# Altium PCB AVR精简学习板.PcbDoc (part 2 of 10)
Units mm, origin at the board's own origin, x right, y up, seen from the top; angles counter-clockwise.
Board outline 152.4 x 101.6 mm, 2 copper layers (Top Layer, Bottom Layer); 44 components, 51 nets, 211 pads, 6 vias.
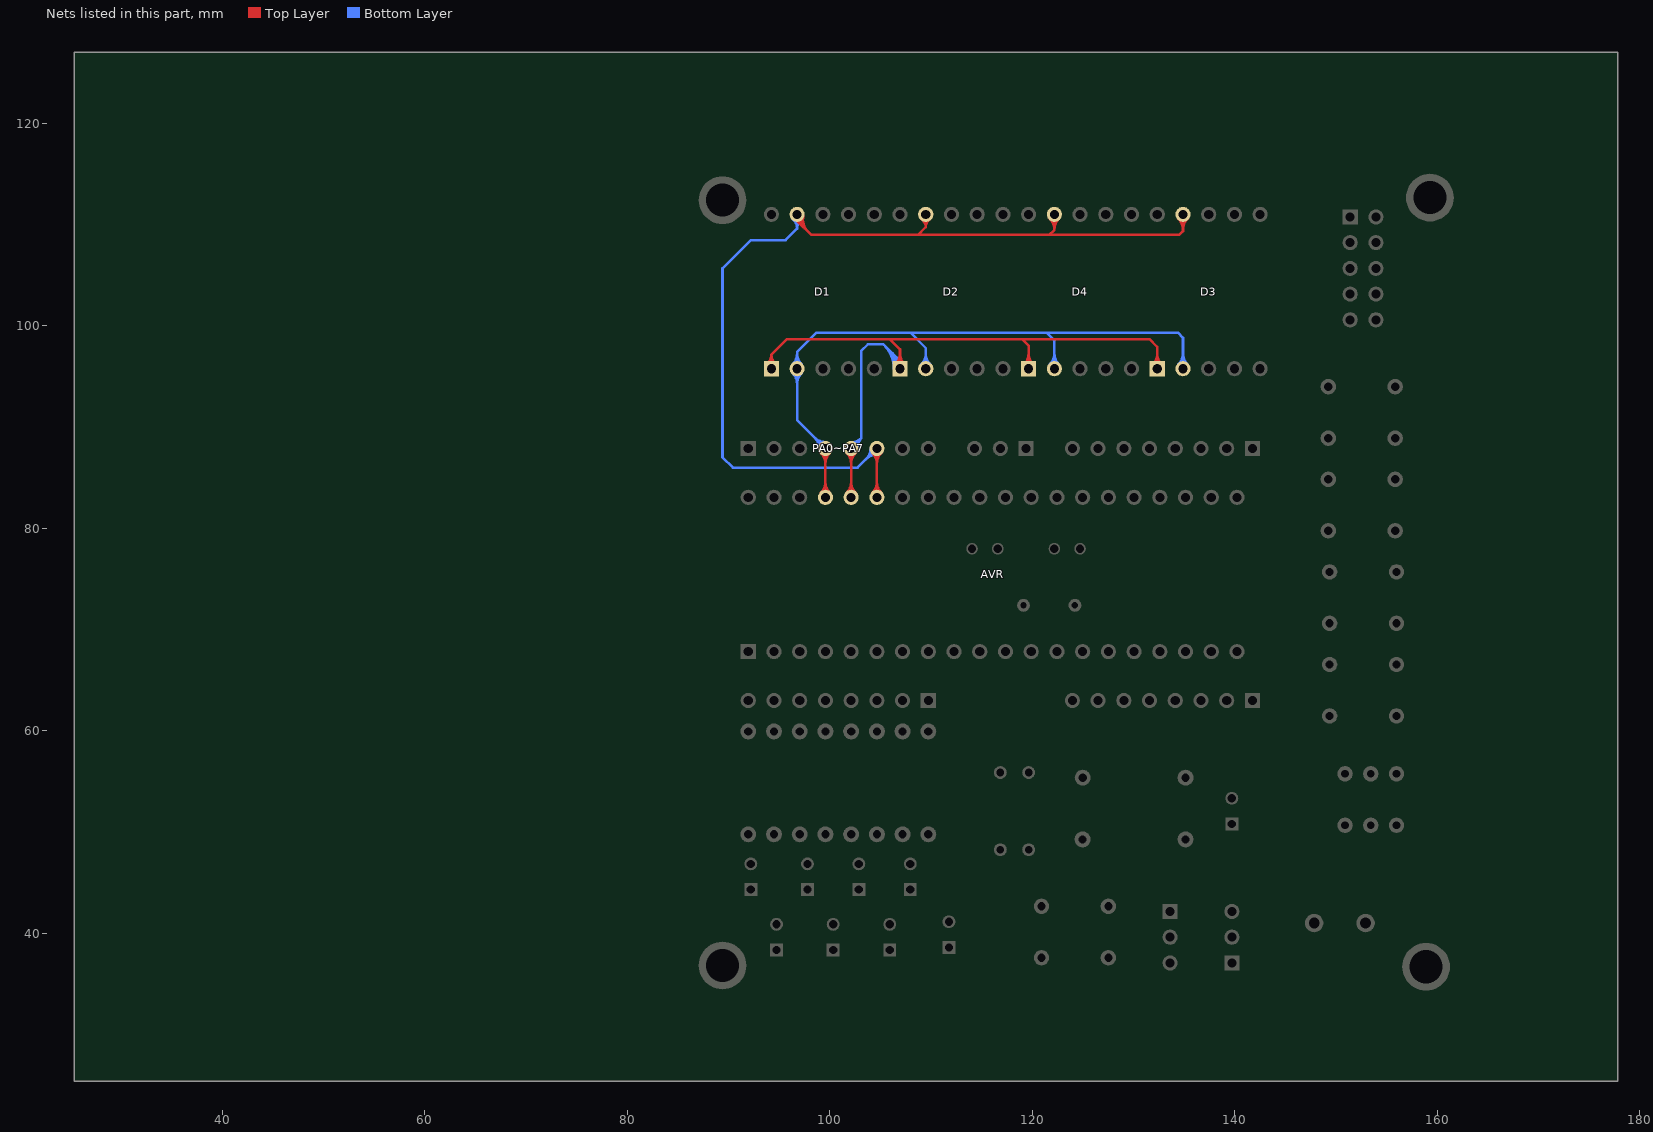
[diagram p2: the nets of this part, all layers, seen from the top]

## Via types
v1: diameter 1.27, hole 0.711, Top Layer to Bottom Layer, 6 vias

## Nets (pads, with @x,y where several pads share a name; then routed paths per layer and width w, separated by ;. In a path a pad name is that pad's centre, name@x,y a point inside that pad or via, vN(x,y) a via of type N, cw(c..) or ccw(c..) an arc to the next point about the centre after c; other vN are vias at no path point) (continued)
D3: AVR.37 D1.2 D2.2 D3.2 D4.2 PA0~PA7.4 | length 276.4
  Top Layer w0.254: AVR.37@99.568,83.058 PA0~PA7.4@99.568,87.884 ; AVR.37@99.127,83.499 ccw(c98.064,84.562) 99.568,84.562 ; AVR.37@99.127,83.499 ccw(c98.064,84.562) 99.568,84.562 ; AVR.37@99.127,83.499 ccw(c98.064,84.562) 99.568,84.562 ; AVR.37@99.127,83.499 ccw(c98.064,84.562) 99.568,84.562 ; AVR.37@99.127,83.499 ccw(c98.064,84.562) 99.568,84.562 ; AVR.37@99.127,83.499 ccw(c98.064,84.562) 99.568,84.562 ; AVR.37@99.127,83.499 ccw(c98.064,84.562) 99.568,84.562 ; PA0~PA7.4@99.127,87.443 cw(c98.064,86.38) 99.568,86.38 ; PA0~PA7.4@99.127,87.443 cw(c98.064,86.38) 99.568,86.38 ; PA0~PA7.4@99.127,87.443 cw(c98.064,86.38) 99.568,86.38 ; PA0~PA7.4@99.127,87.443 cw(c98.064,86.38) 99.568,86.38 ; PA0~PA7.4@99.127,87.443 cw(c98.064,86.38) 99.568,86.38 ; PA0~PA7.4@99.127,87.443 cw(c98.064,86.38) 99.568,86.38 ; PA0~PA7.4@99.127,87.443 cw(c98.064,86.38) 99.568,86.38 ; AVR.37@99.307,83.319 ccw(c98.677,83.949) 99.568,83.949 ; AVR.37@99.307,83.319 ccw(c98.677,83.949) 99.568,83.949 ; AVR.37@99.307,83.319 ccw(c98.677,83.949) 99.568,83.949 ; AVR.37@99.307,83.319 ccw(c98.677,83.949) 99.568,83.949 ; AVR.37@99.307,83.319 ccw(c98.677,83.949) 99.568,83.949 ; AVR.37@99.307,83.319 ccw(c98.677,83.949) 99.568,83.949 ; AVR.37@99.307,83.319 ccw(c98.677,83.949) 99.568,83.949 ; PA0~PA7.4@99.307,87.623 cw(c98.677,86.993) 99.568,86.993 ; PA0~PA7.4@99.307,87.623 cw(c98.677,86.993) 99.568,86.993 ; PA0~PA7.4@99.307,87.623 cw(c98.677,86.993) 99.568,86.993 ; PA0~PA7.4@99.307,87.623 cw(c98.677,86.993) 99.568,86.993 ; PA0~PA7.4@99.307,87.623 cw(c98.677,86.993) 99.568,86.993 ; PA0~PA7.4@99.307,87.623 cw(c98.677,86.993) 99.568,86.993 ; PA0~PA7.4@99.307,87.623 cw(c98.677,86.993) 99.568,86.993 ; 99.568,83.949 ccw(c100.459,83.949) AVR.37@99.829,83.319 ; 99.568,83.949 ccw(c100.459,83.949) AVR.37@99.829,83.319 ; 99.568,83.949 ccw(c100.459,83.949) AVR.37@99.829,83.319 ; 99.568,83.949 ccw(c100.459,83.949) AVR.37@99.829,83.319 ; 99.568,83.949 ccw(c100.459,83.949) AVR.37@99.829,83.319 ; 99.568,83.949 ccw(c100.459,83.949) AVR.37@99.829,83.319 ; 99.568,83.949 ccw(c100.459,83.949) AVR.37@99.829,83.319 ; 99.568,84.562 ccw(c101.072,84.562) AVR.37@100.009,83.499 ; 99.568,84.562 ccw(c101.072,84.562) AVR.37@100.009,83.499 ; 99.568,84.562 ccw(c101.072,84.562) AVR.37@100.009,83.499 ; 99.568,84.562 ccw(c101.072,84.562) AVR.37@100.009,83.499 ; 99.568,84.562 ccw(c101.072,84.562) AVR.37@100.009,83.499 ; 99.568,84.562 ccw(c101.072,84.562) AVR.37@100.009,83.499 ; 99.568,84.562 ccw(c101.072,84.562) AVR.37@100.009,83.499 ; 99.568,86.38 cw(c101.072,86.38) PA0~PA7.4@100.009,87.443 ; 99.568,86.38 cw(c101.072,86.38) PA0~PA7.4@100.009,87.443 ; 99.568,86.38 cw(c101.072,86.38) PA0~PA7.4@100.009,87.443 ; 99.568,86.38 cw(c101.072,86.38) PA0~PA7.4@100.009,87.443 ; 99.568,86.38 cw(c101.072,86.38) PA0~PA7.4@100.009,87.443 ; 99.568,86.38 cw(c101.072,86.38) PA0~PA7.4@100.009,87.443 ; 99.568,86.38 cw(c101.072,86.38) PA0~PA7.4@100.009,87.443 ; 99.568,86.993 cw(c100.459,86.993) PA0~PA7.4@99.829,87.623 ; 99.568,86.993 cw(c100.459,86.993) PA0~PA7.4@99.829,87.623 ; 99.568,86.993 cw(c100.459,86.993) PA0~PA7.4@99.829,87.623 ; 99.568,86.993 cw(c100.459,86.993) PA0~PA7.4@99.829,87.623 ; 99.568,86.993 cw(c100.459,86.993) PA0~PA7.4@99.829,87.623 ; 99.568,86.993 cw(c100.459,86.993) PA0~PA7.4@99.829,87.623 ; 99.568,86.993 cw(c100.459,86.993) PA0~PA7.4@99.829,87.623
  Bottom Layer w0.254: PA0~PA7.4@99.568,87.884 96.774,90.678 96.774,97.409 98.679,99.314 134.366,99.314 134.874,98.806 D3.2@134.874,95.758 ; 107.95,99.314 109.474,97.79 D2.2@109.474,95.758 ; 121.412,99.314 122.174,98.552 D4.2@122.174,95.758 ; D1.2@96.333,95.317 cw(c95.27,94.254) 96.774,94.254 ; D1.2@96.333,95.317 cw(c95.27,94.254) 96.774,94.254 ; D1.2@96.333,95.317 cw(c95.27,94.254) 96.774,94.254 ; D1.2@96.333,95.317 cw(c95.27,94.254) 96.774,94.254 ; D1.2@96.333,95.317 cw(c95.27,94.254) 96.774,94.254 ; D1.2@96.333,95.317 cw(c95.27,94.254) 96.774,94.254 ; D1.2@96.333,95.317 cw(c95.27,94.254) 96.774,94.254 ; D1.2@96.333,96.199 ccw(c95.27,97.262) 96.774,97.262 ; D1.2@96.333,96.199 ccw(c95.27,97.262) 96.774,97.262 ; D1.2@96.333,96.199 ccw(c95.27,97.262) 96.774,97.262 ; D1.2@96.333,96.199 ccw(c95.27,97.262) 96.774,97.262 ; D1.2@96.333,96.199 ccw(c95.27,97.262) 96.774,97.262 ; D1.2@96.333,96.199 ccw(c95.27,97.262) 96.774,97.262 ; D1.2@96.333,96.199 ccw(c95.27,97.262) 96.774,97.262 ; D1.2@96.513,95.497 cw(c95.883,94.867) 96.774,94.867 ; D1.2@96.513,95.497 cw(c95.883,94.867) 96.774,94.867 ; D1.2@96.513,95.497 cw(c95.883,94.867) 96.774,94.867 ; D1.2@96.513,95.497 cw(c95.883,94.867) 96.774,94.867 ; D1.2@96.513,95.497 cw(c95.883,94.867) 96.774,94.867 ; D1.2@96.513,95.497 cw(c95.883,94.867) 96.774,94.867 ; D1.2@96.513,95.497 cw(c95.883,94.867) 96.774,94.867 ; D1.2@96.513,96.019 ccw(c95.883,96.649) 96.774,96.649 ; D1.2@96.513,96.019 ccw(c95.883,96.649) 96.774,96.649 ; D1.2@96.513,96.019 ccw(c95.883,96.649) 96.774,96.649 ; D1.2@96.513,96.019 ccw(c95.883,96.649) 96.774,96.649 ; D1.2@96.513,96.019 ccw(c95.883,96.649) 96.774,96.649 ; D1.2@96.513,96.019 ccw(c95.883,96.649) 96.774,96.649 ; D1.2@96.513,96.019 ccw(c95.883,96.649) 96.774,96.649 ; 96.774,94.254 cw(c98.278,94.254) D1.2@97.215,95.317 ; 96.774,94.254 cw(c98.278,94.254) D1.2@97.215,95.317 ; 96.774,94.254 cw(c98.278,94.254) D1.2@97.215,95.317 ; 96.774,94.254 cw(c98.278,94.254) D1.2@97.215,95.317 ; 96.774,94.254 cw(c98.278,94.254) D1.2@97.215,95.317 ; 96.774,94.254 cw(c98.278,94.254) D1.2@97.215,95.317 ; 96.774,94.254 cw(c98.278,94.254) D1.2@97.215,95.317 ; 96.774,94.867 cw(c97.665,94.867) D1.2@97.035,95.497 ; 96.774,94.867 cw(c97.665,94.867) D1.2@97.035,95.497 ; 96.774,94.867 cw(c97.665,94.867) D1.2@97.035,95.497 ; 96.774,94.867 cw(c97.665,94.867) D1.2@97.035,95.497 ; 96.774,94.867 cw(c97.665,94.867) D1.2@97.035,95.497 ; 96.774,94.867 cw(c97.665,94.867) D1.2@97.035,95.497 ; 96.774,94.867 cw(c97.665,94.867) D1.2@97.035,95.497 ; 96.774,96.649 ccw(c97.665,96.649) D1.2@97.035,96.019 ; 96.774,96.649 ccw(c97.665,96.649) D1.2@97.035,96.019 ; 96.774,96.649 ccw(c97.665,96.649) D1.2@97.035,96.019 ; 96.774,96.649 ccw(c97.665,96.649) D1.2@97.035,96.019 ; 96.774,96.649 ccw(c97.665,96.649) D1.2@97.035,96.019 ; 96.774,96.649 ccw(c97.665,96.649) D1.2@97.035,96.019 ; 96.774,96.649 ccw(c97.665,96.649) D1.2@97.035,96.019 ; 96.774,97.262 ccw(c98.278,97.262) D1.2@97.215,96.199 ; 96.774,97.262 ccw(c98.278,97.262) D1.2@97.215,96.199 ; 96.774,97.262 ccw(c98.278,97.262) D1.2@97.215,96.199 ; 96.774,97.262 ccw(c98.278,97.262) D1.2@97.215,96.199 ; 96.774,97.262 ccw(c98.278,97.262) D1.2@97.215,96.199 ; 96.774,97.262 ccw(c98.278,97.262) D1.2@97.215,96.199 ; 96.774,97.262 ccw(c98.278,97.262) D1.2@97.215,96.199 ; 98.504,88.948 cw(c97.441,87.884) PA0~PA7.4@98.945,87.884 ; 98.504,88.948 ccw(c99.568,90.011) PA0~PA7.4@99.568,88.507 ; 98.504,88.948 cw(c97.441,87.884) PA0~PA7.4@98.945,87.884 ; 98.504,88.948 ccw(c99.568,90.011) PA0~PA7.4@99.568,88.507 ; 98.504,88.948 ccw(c99.568,90.011) PA0~PA7.4@99.568,88.507 ; 98.504,88.948 cw(c97.441,87.884) PA0~PA7.4@98.945,87.884 ; 98.504,88.948 ccw(c99.568,90.011) PA0~PA7.4@99.568,88.507 ; 98.504,88.948 cw(c97.441,87.884) PA0~PA7.4@98.945,87.884 ; 98.504,88.948 ccw(c99.568,90.011) PA0~PA7.4@99.568,88.507 ; 98.504,88.948 cw(c97.441,87.884) PA0~PA7.4@98.945,87.884 ; 98.504,88.948 ccw(c99.568,90.011) PA0~PA7.4@99.568,88.507 ; 98.504,88.948 cw(c97.441,87.884) PA0~PA7.4@98.945,87.884 ; 98.504,88.948 ccw(c99.568,90.011) PA0~PA7.4@99.568,88.507 ; 98.504,88.948 cw(c97.441,87.884) PA0~PA7.4@98.945,87.884 ; 98.938,88.514 cw(c98.308,87.884) PA0~PA7.4@99.199,87.884 ; 98.938,88.514 ccw(c99.568,89.144) PA0~PA7.4@99.568,88.253 ; 98.938,88.514 cw(c98.308,87.884) PA0~PA7.4@99.199,87.884 ; 98.938,88.514 ccw(c99.568,89.144) PA0~PA7.4@99.568,88.253 ; 98.938,88.514 ccw(c99.568,89.144) PA0~PA7.4@99.568,88.253 ; 98.938,88.514 cw(c98.308,87.884) PA0~PA7.4@99.199,87.884 ; 98.938,88.514 ccw(c99.568,89.144) PA0~PA7.4@99.568,88.253 ; 98.938,88.514 cw(c98.308,87.884) PA0~PA7.4@99.199,87.884 ; 98.938,88.514 ccw(c99.568,89.144) PA0~PA7.4@99.568,88.253 ; 98.938,88.514 cw(c98.308,87.884) PA0~PA7.4@99.199,87.884 ; 98.938,88.514 ccw(c99.568,89.144) PA0~PA7.4@99.568,88.253 ; 98.938,88.514 cw(c98.308,87.884) PA0~PA7.4@99.199,87.884 ; 98.938,88.514 ccw(c99.568,89.144) PA0~PA7.4@99.568,88.253 ; 98.938,88.514 cw(c98.308,87.884) PA0~PA7.4@99.199,87.884 ; D2.2@109.033,96.199 ccw(c107.97,97.262) 109.474,97.262 ; D2.2@109.033,96.199 ccw(c107.97,97.262) 109.474,97.262 ; D2.2@109.033,96.199 ccw(c107.97,97.262) 109.474,97.262 ; D2.2@109.033,96.199 ccw(c107.97,97.262) 109.474,97.262 ; D2.2@109.033,96.199 ccw(c107.97,97.262) 109.474,97.262 ; D2.2@109.033,96.199 ccw(c107.97,97.262) 109.474,97.262 ; D2.2@109.033,96.199 ccw(c107.97,97.262) 109.474,97.262 ; D2.2@109.213,96.019 ccw(c108.583,96.649) 109.474,96.649 ; D2.2@109.213,96.019 ccw(c108.583,96.649) 109.474,96.649 ; D2.2@109.213,96.019 ccw(c108.583,96.649) 109.474,96.649 ; D2.2@109.213,96.019 ccw(c108.583,96.649) 109.474,96.649 ; D2.2@109.213,96.019 ccw(c108.583,96.649) 109.474,96.649 ; D2.2@109.213,96.019 ccw(c108.583,96.649) 109.474,96.649 ; D2.2@109.213,96.019 ccw(c108.583,96.649) 109.474,96.649 ; 109.474,96.649 ccw(c110.365,96.649) D2.2@109.735,96.019 ; 109.474,96.649 ccw(c110.365,96.649) D2.2@109.735,96.019 ; 109.474,96.649 ccw(c110.365,96.649) D2.2@109.735,96.019 ; 109.474,96.649 ccw(c110.365,96.649) D2.2@109.735,96.019 ; 109.474,96.649 ccw(c110.365,96.649) D2.2@109.735,96.019 ; 109.474,96.649 ccw(c110.365,96.649) D2.2@109.735,96.019 ; 109.474,96.649 ccw(c110.365,96.649) D2.2@109.735,96.019 ; 109.474,97.262 ccw(c110.978,97.262) D2.2@109.915,96.199 ; 109.474,97.262 ccw(c110.978,97.262) D2.2@109.915,96.199 ; 109.474,97.262 ccw(c110.978,97.262) D2.2@109.915,96.199 ; 109.474,97.262 ccw(c110.978,97.262) D2.2@109.915,96.199 ; 109.474,97.262 ccw(c110.978,97.262) D2.2@109.915,96.199 ; 109.474,97.262 ccw(c110.978,97.262) D2.2@109.915,96.199 ; 109.474,97.262 ccw(c110.978,97.262) D2.2@109.915,96.199 ; D4.2@121.733,96.199 ccw(c120.67,97.262) 122.174,97.262 ; D4.2@121.733,96.199 ccw(c120.67,97.262) 122.174,97.262 ; D4.2@121.733,96.199 ccw(c120.67,97.262) 122.174,97.262 ; D4.2@121.733,96.199 ccw(c120.67,97.262) 122.174,97.262 ; D4.2@121.733,96.199 ccw(c120.67,97.262) 122.174,97.262 ; D4.2@121.733,96.199 ccw(c120.67,97.262) 122.174,97.262 ; D4.2@121.733,96.199 ccw(c120.67,97.262) 122.174,97.262 ; D4.2@121.913,96.019 ccw(c121.283,96.649) 122.174,96.649 ; D4.2@121.913,96.019 ccw(c121.283,96.649) 122.174,96.649 ; D4.2@121.913,96.019 ccw(c121.283,96.649) 122.174,96.649 ; D4.2@121.913,96.019 ccw(c121.283,96.649) 122.174,96.649 ; D4.2@121.913,96.019 ccw(c121.283,96.649) 122.174,96.649 ; D4.2@121.913,96.019 ccw(c121.283,96.649) 122.174,96.649 ; D4.2@121.913,96.019 ccw(c121.283,96.649) 122.174,96.649 ; 122.174,96.649 ccw(c123.065,96.649) D4.2@122.435,96.019 ; 122.174,96.649 ccw(c123.065,96.649) D4.2@122.435,96.019 ; 122.174,96.649 ccw(c123.065,96.649) D4.2@122.435,96.019 ; 122.174,96.649 ccw(c123.065,96.649) D4.2@122.435,96.019 ; 122.174,96.649 ccw(c123.065,96.649) D4.2@122.435,96.019 ; 122.174,96.649 ccw(c123.065,96.649) D4.2@122.435,96.019 ; 122.174,96.649 ccw(c123.065,96.649) D4.2@122.435,96.019 ; 122.174,97.262 ccw(c123.678,97.262) D4.2@122.615,96.199 ; 122.174,97.262 ccw(c123.678,97.262) D4.2@122.615,96.199 ; 122.174,97.262 ccw(c123.678,97.262) D4.2@122.615,96.199 ; 122.174,97.262 ccw(c123.678,97.262) D4.2@122.615,96.199 ; 122.174,97.262 ccw(c123.678,97.262) D4.2@122.615,96.199 ; 122.174,97.262 ccw(c123.678,97.262) D4.2@122.615,96.199 ; 122.174,97.262 ccw(c123.678,97.262) D4.2@122.615,96.199 ; D3.2@134.433,96.199 ccw(c133.37,97.262) 134.874,97.262 ; D3.2@134.433,96.199 ccw(c133.37,97.262) 134.874,97.262 ; D3.2@134.433,96.199 ccw(c133.37,97.262) 134.874,97.262 ; D3.2@134.433,96.199 ccw(c133.37,97.262) 134.874,97.262 ; D3.2@134.433,96.199 ccw(c133.37,97.262) 134.874,97.262 ; D3.2@134.433,96.199 ccw(c133.37,97.262) 134.874,97.262 ; D3.2@134.433,96.199 ccw(c133.37,97.262) 134.874,97.262 ; D3.2@134.613,96.019 ccw(c133.983,96.649) 134.874,96.649 ; D3.2@134.613,96.019 ccw(c133.983,96.649) 134.874,96.649 ; D3.2@134.613,96.019 ccw(c133.983,96.649) 134.874,96.649 ; D3.2@134.613,96.019 ccw(c133.983,96.649) 134.874,96.649 ; D3.2@134.613,96.019 ccw(c133.983,96.649) 134.874,96.649 ; D3.2@134.613,96.019 ccw(c133.983,96.649) 134.874,96.649 ; D3.2@134.613,96.019 ccw(c133.983,96.649) 134.874,96.649 ; 134.874,96.649 ccw(c135.765,96.649) D3.2@135.135,96.019 ; 134.874,96.649 ccw(c135.765,96.649) D3.2@135.135,96.019 ; 134.874,96.649 ccw(c135.765,96.649) D3.2@135.135,96.019 ; 134.874,96.649 ccw(c135.765,96.649) D3.2@135.135,96.019 ; 134.874,96.649 ccw(c135.765,96.649) D3.2@135.135,96.019 ; 134.874,96.649 ccw(c135.765,96.649) D3.2@135.135,96.019 ; 134.874,96.649 ccw(c135.765,96.649) D3.2@135.135,96.019 ; 134.874,97.262 ccw(c136.378,97.262) D3.2@135.315,96.199 ; 134.874,97.262 ccw(c136.378,97.262) D3.2@135.315,96.199 ; 134.874,97.262 ccw(c136.378,97.262) D3.2@135.315,96.199 ; 134.874,97.262 ccw(c136.378,97.262) D3.2@135.315,96.199 ; 134.874,97.262 ccw(c136.378,97.262) D3.2@135.315,96.199 ; 134.874,97.262 ccw(c136.378,97.262) D3.2@135.315,96.199 ; 134.874,97.262 ccw(c136.378,97.262) D3.2@135.315,96.199
D4: AVR.36 D1.1 D2.1 D3.1 D4.1 PA0~PA7.5 | length 305.6
  Top Layer w0.254: D1.1@94.234,95.631 94.234,97.155 ; AVR.36@102.108,83.058 PA0~PA7.5@102.108,87.884 ; 105.918,98.679 106.934,97.663 D2.1@106.934,95.758 ; 118.999,98.679 119.634,98.044 D4.1@119.634,95.758 ; D3.1@132.334,95.758 132.334,97.917 131.572,98.679 95.758,98.679 94.234,97.155 ; D1.1@93.818,96.222 ccw(c92.979,97.155) 94.234,97.155 ; D1.1@93.818,96.222 ccw(c92.979,97.155) 94.234,97.155 ; D1.1@93.818,96.222 ccw(c92.979,97.155) 94.234,97.155 ; D1.1@93.818,96.222 ccw(c92.979,97.155) 94.234,97.155 ; D1.1@93.818,96.222 ccw(c92.979,97.155) 94.234,97.155 ; D1.1@93.818,96.222 ccw(c92.979,97.155) 94.234,97.155 ; D1.1@93.818,96.222 ccw(c92.979,97.155) 94.234,97.155 ; D1.1@93.987,96.033 ccw(c93.491,96.585) 94.234,96.585 ; D1.1@93.987,96.033 ccw(c93.491,96.585) 94.234,96.585 ; D1.1@93.987,96.033 ccw(c93.491,96.585) 94.234,96.585 ; D1.1@93.987,96.033 ccw(c93.491,96.585) 94.234,96.585 ; D1.1@93.987,96.033 ccw(c93.491,96.585) 94.234,96.585 ; D1.1@93.987,96.033 ccw(c93.491,96.585) 94.234,96.585 ; D1.1@93.987,96.033 ccw(c93.491,96.585) 94.234,96.585 ; 94.234,96.585 ccw(c94.977,96.585) D1.1@94.481,96.033 ; 94.234,96.585 ccw(c94.977,96.585) D1.1@94.481,96.033 ; 94.234,96.585 ccw(c94.977,96.585) D1.1@94.481,96.033 ; 94.234,96.585 ccw(c94.977,96.585) D1.1@94.481,96.033 ; 94.234,96.585 ccw(c94.977,96.585) D1.1@94.481,96.033 ; 94.234,96.585 ccw(c94.977,96.585) D1.1@94.481,96.033 ; 94.234,96.585 ccw(c94.977,96.585) D1.1@94.481,96.033 ; 94.234,97.155 ccw(c95.489,97.155) D1.1@94.65,96.222 ; 94.234,97.155 ccw(c95.489,97.155) D1.1@94.65,96.222 ; 94.234,97.155 ccw(c95.489,97.155) D1.1@94.65,96.222 ; 94.234,97.155 ccw(c95.489,97.155) D1.1@94.65,96.222 ; 94.234,97.155 ccw(c95.489,97.155) D1.1@94.65,96.222 ; 94.234,97.155 ccw(c95.489,97.155) D1.1@94.65,96.222 ; 94.234,97.155 ccw(c95.489,97.155) D1.1@94.65,96.222 ; AVR.36@101.667,83.499 ccw(c100.604,84.562) 102.108,84.562 ; AVR.36@101.667,83.499 ccw(c100.604,84.562) 102.108,84.562 ; AVR.36@101.667,83.499 ccw(c100.604,84.562) 102.108,84.562 ; AVR.36@101.667,83.499 ccw(c100.604,84.562) 102.108,84.562 ; AVR.36@101.667,83.499 ccw(c100.604,84.562) 102.108,84.562 ; AVR.36@101.667,83.499 ccw(c100.604,84.562) 102.108,84.562 ; AVR.36@101.667,83.499 ccw(c100.604,84.562) 102.108,84.562 ; PA0~PA7.5@101.667,87.443 cw(c100.604,86.38) 102.108,86.38 ; PA0~PA7.5@101.667,87.443 cw(c100.604,86.38) 102.108,86.38 ; PA0~PA7.5@101.667,87.443 cw(c100.604,86.38) 102.108,86.38 ; PA0~PA7.5@101.667,87.443 cw(c100.604,86.38) 102.108,86.38 ; PA0~PA7.5@101.667,87.443 cw(c100.604,86.38) 102.108,86.38 ; PA0~PA7.5@101.667,87.443 cw(c100.604,86.38) 102.108,86.38 ; PA0~PA7.5@101.667,87.443 cw(c100.604,86.38) 102.108,86.38 ; AVR.36@101.847,83.319 ccw(c101.217,83.949) 102.108,83.949 ; AVR.36@101.847,83.319 ccw(c101.217,83.949) 102.108,83.949 ; AVR.36@101.847,83.319 ccw(c101.217,83.949) 102.108,83.949 ; AVR.36@101.847,83.319 ccw(c101.217,83.949) 102.108,83.949 ; AVR.36@101.847,83.319 ccw(c101.217,83.949) 102.108,83.949 ; AVR.36@101.847,83.319 ccw(c101.217,83.949) 102.108,83.949 ; AVR.36@101.847,83.319 ccw(c101.217,83.949) 102.108,83.949 ; PA0~PA7.5@101.847,87.623 cw(c101.217,86.993) 102.108,86.993 ; PA0~PA7.5@101.847,87.623 cw(c101.217,86.993) 102.108,86.993 ; PA0~PA7.5@101.847,87.623 cw(c101.217,86.993) 102.108,86.993 ; PA0~PA7.5@101.847,87.623 cw(c101.217,86.993) 102.108,86.993 ; PA0~PA7.5@101.847,87.623 cw(c101.217,86.993) 102.108,86.993 ; PA0~PA7.5@101.847,87.623 cw(c101.217,86.993) 102.108,86.993 ; PA0~PA7.5@101.847,87.623 cw(c101.217,86.993) 102.108,86.993 ; 102.108,83.949 ccw(c102.999,83.949) AVR.36@102.369,83.319 ; 102.108,83.949 ccw(c102.999,83.949) AVR.36@102.369,83.319 ; 102.108,83.949 ccw(c102.999,83.949) AVR.36@102.369,83.319 ; 102.108,83.949 ccw(c102.999,83.949) AVR.36@102.369,83.319 ; 102.108,83.949 ccw(c102.999,83.949) AVR.36@102.369,83.319 ; 102.108,83.949 ccw(c102.999,83.949) AVR.36@102.369,83.319 ; 102.108,83.949 ccw(c102.999,83.949) AVR.36@102.369,83.319 ; 102.108,84.562 ccw(c103.612,84.562) AVR.36@102.549,83.499 ; 102.108,84.562 ccw(c103.612,84.562) AVR.36@102.549,83.499 ; 102.108,84.562 ccw(c103.612,84.562) AVR.36@102.549,83.499 ; 102.108,84.562 ccw(c103.612,84.562) AVR.36@102.549,83.499 ; 102.108,84.562 ccw(c103.612,84.562) AVR.36@102.549,83.499 ; 102.108,84.562 ccw(c103.612,84.562) AVR.36@102.549,83.499 ; 102.108,84.562 ccw(c103.612,84.562) AVR.36@102.549,83.499 ; 102.108,86.38 cw(c103.612,86.38) PA0~PA7.5@102.549,87.443 ; 102.108,86.38 cw(c103.612,86.38) PA0~PA7.5@102.549,87.443 ; 102.108,86.38 cw(c103.612,86.38) PA0~PA7.5@102.549,87.443 ; 102.108,86.38 cw(c103.612,86.38) PA0~PA7.5@102.549,87.443 ; 102.108,86.38 cw(c103.612,86.38) PA0~PA7.5@102.549,87.443 ; 102.108,86.38 cw(c103.612,86.38) PA0~PA7.5@102.549,87.443 ; 102.108,86.38 cw(c103.612,86.38) PA0~PA7.5@102.549,87.443 ; 102.108,86.993 cw(c102.999,86.993) PA0~PA7.5@102.369,87.623 ; 102.108,86.993 cw(c102.999,86.993) PA0~PA7.5@102.369,87.623 ; 102.108,86.993 cw(c102.999,86.993) PA0~PA7.5@102.369,87.623 ; 102.108,86.993 cw(c102.999,86.993) PA0~PA7.5@102.369,87.623 ; 102.108,86.993 cw(c102.999,86.993) PA0~PA7.5@102.369,87.623 ; 102.108,86.993 cw(c102.999,86.993) PA0~PA7.5@102.369,87.623 ; 102.108,86.993 cw(c102.999,86.993) PA0~PA7.5@102.369,87.623 ; D2.1@106.493,96.199 ccw(c105.43,97.262) 106.934,97.262 ; D2.1@106.493,96.199 ccw(c105.43,97.262) 106.934,97.262 ; D2.1@106.493,96.199 ccw(c105.43,97.262) 106.934,97.262 ; D2.1@106.493,96.199 ccw(c105.43,97.262) 106.934,97.262 ; D2.1@106.493,96.199 ccw(c105.43,97.262) 106.934,97.262 ; D2.1@106.493,96.199 ccw(c105.43,97.262) 106.934,97.262 ; D2.1@106.493,96.199 ccw(c105.43,97.262) 106.934,97.262 ; D2.1@106.673,96.019 ccw(c106.043,96.649) 106.934,96.649 ; D2.1@106.673,96.019 ccw(c106.043,96.649) 106.934,96.649 ; D2.1@106.673,96.019 ccw(c106.043,96.649) 106.934,96.649 ; D2.1@106.673,96.019 ccw(c106.043,96.649) 106.934,96.649 ; D2.1@106.673,96.019 ccw(c106.043,96.649) 106.934,96.649 ; D2.1@106.673,96.019 ccw(c106.043,96.649) 106.934,96.649 ; D2.1@106.673,96.019 ccw(c106.043,96.649) 106.934,96.649 ; 106.934,96.649 ccw(c107.825,96.649) D2.1@107.195,96.019 ; 106.934,96.649 ccw(c107.825,96.649) D2.1@107.195,96.019 ; 106.934,96.649 ccw(c107.825,96.649) D2.1@107.195,96.019 ; 106.934,96.649 ccw(c107.825,96.649) D2.1@107.195,96.019 ; 106.934,96.649 ccw(c107.825,96.649) D2.1@107.195,96.019 ; 106.934,96.649 ccw(c107.825,96.649) D2.1@107.195,96.019 ; 106.934,96.649 ccw(c107.825,96.649) D2.1@107.195,96.019 ; 106.934,97.262 ccw(c108.438,97.262) D2.1@107.375,96.199 ; 106.934,97.262 ccw(c108.438,97.262) D2.1@107.375,96.199 ; 106.934,97.262 ccw(c108.438,97.262) D2.1@107.375,96.199 ; 106.934,97.262 ccw(c108.438,97.262) D2.1@107.375,96.199 ; 106.934,97.262 ccw(c108.438,97.262) D2.1@107.375,96.199 ; 106.934,97.262 ccw(c108.438,97.262) D2.1@107.375,96.199 ; 106.934,97.262 ccw(c108.438,97.262) D2.1@107.375,96.199 ; D4.1@119.193,96.199 ccw(c118.13,97.262) 119.634,97.262 ; D4.1@119.193,96.199 ccw(c118.13,97.262) 119.634,97.262 ; D4.1@119.193,96.199 ccw(c118.13,97.262) 119.634,97.262 ; D4.1@119.193,96.199 ccw(c118.13,97.262) 119.634,97.262 ; D4.1@119.193,96.199 ccw(c118.13,97.262) 119.634,97.262 ; D4.1@119.193,96.199 ccw(c118.13,97.262) 119.634,97.262 ; D4.1@119.193,96.199 ccw(c118.13,97.262) 119.634,97.262 ; D4.1@119.373,96.019 ccw(c118.743,96.649) 119.634,96.649 ; D4.1@119.373,96.019 ccw(c118.743,96.649) 119.634,96.649 ; D4.1@119.373,96.019 ccw(c118.743,96.649) 119.634,96.649 ; D4.1@119.373,96.019 ccw(c118.743,96.649) 119.634,96.649 ; D4.1@119.373,96.019 ccw(c118.743,96.649) 119.634,96.649 ; D4.1@119.373,96.019 ccw(c118.743,96.649) 119.634,96.649 ; D4.1@119.373,96.019 ccw(c118.743,96.649) 119.634,96.649 ; 119.634,96.649 ccw(c120.525,96.649) D4.1@119.895,96.019 ; 119.634,96.649 ccw(c120.525,96.649) D4.1@119.895,96.019 ; 119.634,96.649 ccw(c120.525,96.649) D4.1@119.895,96.019 ; 119.634,96.649 ccw(c120.525,96.649) D4.1@119.895,96.019 ; 119.634,96.649 ccw(c120.525,96.649) D4.1@119.895,96.019 ; 119.634,96.649 ccw(c120.525,96.649) D4.1@119.895,96.019 ; 119.634,96.649 ccw(c120.525,96.649) D4.1@119.895,96.019 ; 119.634,97.262 ccw(c121.138,97.262) D4.1@120.075,96.199 ; 119.634,97.262 ccw(c121.138,97.262) D4.1@120.075,96.199 ; 119.634,97.262 ccw(c121.138,97.262) D4.1@120.075,96.199 ; 119.634,97.262 ccw(c121.138,97.262) D4.1@120.075,96.199 ; 119.634,97.262 ccw(c121.138,97.262) D4.1@120.075,96.199 ; 119.634,97.262 ccw(c121.138,97.262) D4.1@120.075,96.199 ; 119.634,97.262 ccw(c121.138,97.262) D4.1@120.075,96.199 ; D3.1@131.893,96.199 ccw(c130.83,97.262) 132.334,97.262 ; D3.1@131.893,96.199 ccw(c130.83,97.262) 132.334,97.262 ; D3.1@131.893,96.199 ccw(c130.83,97.262) 132.334,97.262 ; D3.1@131.893,96.199 ccw(c130.83,97.262) 132.334,97.262 ; D3.1@131.893,96.199 ccw(c130.83,97.262) 132.334,97.262 ; D3.1@131.893,96.199 ccw(c130.83,97.262) 132.334,97.262 ; D3.1@131.893,96.199 ccw(c130.83,97.262) 132.334,97.262 ; D3.1@132.073,96.019 ccw(c131.443,96.649) 132.334,96.649 ; D3.1@132.073,96.019 ccw(c131.443,96.649) 132.334,96.649 ; D3.1@132.073,96.019 ccw(c131.443,96.649) 132.334,96.649 ; D3.1@132.073,96.019 ccw(c131.443,96.649) 132.334,96.649 ; D3.1@132.073,96.019 ccw(c131.443,96.649) 132.334,96.649 ; D3.1@132.073,96.019 ccw(c131.443,96.649) 132.334,96.649 ; D3.1@132.073,96.019 ccw(c131.443,96.649) 132.334,96.649 ; 132.334,96.649 ccw(c133.225,96.649) D3.1@132.595,96.019 ; 132.334,96.649 ccw(c133.225,96.649) D3.1@132.595,96.019 ; 132.334,96.649 ccw(c133.225,96.649) D3.1@132.595,96.019 ; 132.334,96.649 ccw(c133.225,96.649) D3.1@132.595,96.019 ; 132.334,96.649 ccw(c133.225,96.649) D3.1@132.595,96.019 ; 132.334,96.649 ccw(c133.225,96.649) D3.1@132.595,96.019 ; 132.334,96.649 ccw(c133.225,96.649) D3.1@132.595,96.019 ; 132.334,97.262 ccw(c133.838,97.262) D3.1@132.775,96.199 ; 132.334,97.262 ccw(c133.838,97.262) D3.1@132.775,96.199 ; 132.334,97.262 ccw(c133.838,97.262) D3.1@132.775,96.199 ; 132.334,97.262 ccw(c133.838,97.262) D3.1@132.775,96.199 ; 132.334,97.262 ccw(c133.838,97.262) D3.1@132.775,96.199 ; 132.334,97.262 ccw(c133.838,97.262) D3.1@132.775,96.199 ; 132.334,97.262 ccw(c133.838,97.262) D3.1@132.775,96.199
  Bottom Layer w0.254: PA0~PA7.5@102.108,87.884 103.124,88.9 ; D2.1@106.934,95.758 106.934,96.52 ; PA0~PA7.5@102.12,88.253 ccw(c102.146,89.049) 102.71,88.486 ; PA0~PA7.5@102.12,88.253 ccw(c102.146,89.049) 102.71,88.486 ; PA0~PA7.5@102.12,88.253 ccw(c102.146,89.049) 102.71,88.486 ; PA0~PA7.5@102.12,88.253 ccw(c102.146,89.049) 102.71,88.486 ; PA0~PA7.5@102.12,88.253 ccw(c102.146,89.049) 102.71,88.486 ; PA0~PA7.5@102.12,88.253 ccw(c102.146,89.049) 102.71,88.486 ; PA0~PA7.5@102.12,88.253 ccw(c102.146,89.049) 102.71,88.486 ; PA0~PA7.5@102.128,88.507 ccw(c102.173,89.851) 103.124,88.9 ; PA0~PA7.5@102.128,88.507 ccw(c102.173,89.851) 103.124,88.9 ; PA0~PA7.5@102.128,88.507 ccw(c102.173,89.851) 103.124,88.9 ; PA0~PA7.5@102.128,88.507 ccw(c102.173,89.851) 103.124,88.9 ; PA0~PA7.5@102.128,88.507 ccw(c102.173,89.851) 103.124,88.9 ; PA0~PA7.5@102.128,88.507 ccw(c102.173,89.851) 103.124,88.9 ; PA0~PA7.5@102.128,88.507 ccw(c102.173,89.851) 103.124,88.9 ; PA0~PA7.5@102.477,87.896 cw(c103.273,87.922) 102.71,88.486 ; PA0~PA7.5@102.477,87.896 cw(c103.273,87.922) 102.71,88.486 ; PA0~PA7.5@102.477,87.896 cw(c103.273,87.922) 102.71,88.486 ; PA0~PA7.5@102.477,87.896 cw(c103.273,87.922) 102.71,88.486 ; PA0~PA7.5@102.477,87.896 cw(c103.273,87.922) 102.71,88.486 ; PA0~PA7.5@102.477,87.896 cw(c103.273,87.922) 102.71,88.486 ; PA0~PA7.5@102.477,87.896 cw(c103.273,87.922) 102.71,88.486 ; PA0~PA7.5@102.731,87.904 cw(c104.075,87.949) 103.124,88.9 ; PA0~PA7.5@102.731,87.904 cw(c104.075,87.949) 103.124,88.9 ; PA0~PA7.5@102.731,87.904 cw(c104.075,87.949) 103.124,88.9 ; PA0~PA7.5@102.731,87.904 cw(c104.075,87.949) 103.124,88.9 ; PA0~PA7.5@102.731,87.904 cw(c104.075,87.949) 103.124,88.9 ; PA0~PA7.5@102.731,87.904 cw(c104.075,87.949) 103.124,88.9 ; PA0~PA7.5@102.731,87.904 cw(c104.075,87.949) 103.124,88.9 ; 103.124,88.9 103.124,97.536 103.759,98.171 105.283,98.171 106.934,96.52 ; 105.332,98.122 cw(c102.967,95.758) D2.1@106.311,95.758 ; 105.332,98.122 cw(c102.967,95.758) D2.1@106.311,95.758 ; 105.332,98.122 cw(c102.967,95.758) D2.1@106.311,95.758 ; 105.332,98.122 cw(c102.967,95.758) D2.1@106.311,95.758 ; 105.332,98.122 cw(c102.967,95.758) D2.1@106.311,95.758 ; 105.332,98.122 cw(c102.967,95.758) D2.1@106.311,95.758 ; 105.332,98.122 cw(c102.967,95.758) D2.1@106.311,95.758 ; 105.765,97.689 cw(c103.835,95.758) D2.1@106.565,95.758 ; 105.765,97.689 cw(c103.835,95.758) D2.1@106.565,95.758 ; 105.765,97.689 cw(c103.835,95.758) D2.1@106.565,95.758 ; 105.765,97.689 cw(c103.835,95.758) D2.1@106.565,95.758 ; 105.765,97.689 cw(c103.835,95.758) D2.1@106.565,95.758 ; 105.765,97.689 cw(c103.835,95.758) D2.1@106.565,95.758 ; 105.765,97.689 cw(c103.835,95.758) D2.1@106.565,95.758 ; 106.199,97.255 cw(c104.702,95.758) D2.1@106.819,95.758 ; 106.199,97.255 cw(c104.702,95.758) D2.1@106.819,95.758 ; 106.199,97.255 cw(c104.702,95.758) D2.1@106.819,95.758 ; 106.199,97.255 cw(c104.702,95.758) D2.1@106.819,95.758 ; 106.199,97.255 cw(c104.702,95.758) D2.1@106.819,95.758 ; 106.199,97.255 cw(c104.702,95.758) D2.1@106.819,95.758 ; 106.199,97.255 cw(c104.702,95.758) D2.1@106.819,95.758 ; 106.632,96.822 cw(c105.569,95.758) D2.1@107.073,95.758 ; 106.632,96.822 cw(c105.569,95.758) D2.1@107.073,95.758 ; 106.632,96.822 cw(c105.569,95.758) D2.1@107.073,95.758 ; 106.632,96.822 cw(c105.569,95.758) D2.1@107.073,95.758 ; 106.632,96.822 cw(c105.569,95.758) D2.1@107.073,95.758 ; 106.632,96.822 cw(c105.569,95.758) D2.1@107.073,95.758 ; 106.632,96.822 cw(c105.569,95.758) D2.1@107.073,95.758 ; D2.1@106.81,96.369 ccw(c106.78,96.52) 106.934,96.52 ; D2.1@106.81,96.369 ccw(c106.78,96.52) 106.934,96.52 ; D2.1@106.81,96.369 ccw(c106.78,96.52) 106.934,96.52 ; D2.1@106.81,96.369 ccw(c106.78,96.52) 106.934,96.52 ; D2.1@106.81,96.369 ccw(c106.78,96.52) 106.934,96.52 ; D2.1@106.81,96.369 ccw(c106.78,96.52) 106.934,96.52 ; D2.1@106.81,96.369 ccw(c106.78,96.52) 106.934,96.52 ; 106.934,96.52 ccw(c107.088,96.52) D2.1@107.058,96.369 ; 106.934,96.52 ccw(c107.088,96.52) D2.1@107.058,96.369 ; 106.934,96.52 ccw(c107.088,96.52) D2.1@107.058,96.369 ; 106.934,96.52 ccw(c107.088,96.52) D2.1@107.058,96.369 ; 106.934,96.52 ccw(c107.088,96.52) D2.1@107.058,96.369 ; 106.934,96.52 ccw(c107.088,96.52) D2.1@107.058,96.369 ; 106.934,96.52 ccw(c107.088,96.52) D2.1@107.058,96.369
D5: AVR.35 D1.9 D2.9 D3.9 D4.9 PA0~PA7.6 | length 301.4
  Top Layer w0.254: D1.9@96.393,110.998 D1.9@96.774,110.998 96.774,110.363 98.171,108.966 134.493,108.966 134.874,109.347 D3.9@134.874,110.998 ; AVR.35@104.648,83.058 PA0~PA7.6@104.648,87.884 ; 108.712,108.966 109.474,109.728 ; D2.9@109.474,110.998 109.474,109.728 ; 121.666,108.966 122.174,109.474 D4.9@122.174,110.998 ; D1.9@96.886,110.974 ccw(c97.987,110.741) 97.191,109.946 ; D1.9@96.886,110.974 ccw(c97.987,110.741) 97.191,109.946 ; D1.9@96.886,110.974 ccw(c97.987,110.741) 97.191,109.946 ; D1.9@96.886,110.974 ccw(c97.987,110.741) 97.191,109.946 ; D1.9@96.886,110.974 ccw(c97.987,110.741) 97.191,109.946 ; D1.9@96.886,110.974 ccw(c97.987,110.741) 97.191,109.946 ; D1.9@96.886,110.974 ccw(c97.987,110.741) 97.191,109.946 ; D1.9@97.135,110.921 ccw(c98.533,110.625) 97.522,109.615 ; D1.9@97.135,110.921 ccw(c98.533,110.625) 97.522,109.615 ; D1.9@97.135,110.921 ccw(c98.533,110.625) 97.522,109.615 ; D1.9@97.135,110.921 ccw(c98.533,110.625) 97.522,109.615 ; D1.9@97.135,110.921 ccw(c98.533,110.625) 97.522,109.615 ; D1.9@97.135,110.921 ccw(c98.533,110.625) 97.522,109.615 ; D1.9@97.135,110.921 ccw(c98.533,110.625) 97.522,109.615 ; D1.9@97.383,110.869 ccw(c99.079,110.509) 97.853,109.284 ; D1.9@97.383,110.869 ccw(c99.079,110.509) 97.853,109.284 ; D1.9@97.383,110.869 ccw(c99.079,110.509) 97.853,109.284 ; D1.9@97.383,110.869 ccw(c99.079,110.509) 97.853,109.284 ; D1.9@97.383,110.869 ccw(c99.079,110.509) 97.853,109.284 ; D1.9@97.383,110.869 ccw(c99.079,110.509) 97.853,109.284 ; D1.9@97.383,110.869 ccw(c99.079,110.509) 97.853,109.284 ; AVR.35@104.207,83.499 ccw(c103.144,84.562) 104.648,84.562 ; AVR.35@104.207,83.499 ccw(c103.144,84.562) 104.648,84.562 ; AVR.35@104.207,83.499 ccw(c103.144,84.562) 104.648,84.562 ; AVR.35@104.207,83.499 ccw(c103.144,84.562) 104.648,84.562 ; AVR.35@104.207,83.499 ccw(c103.144,84.562) 104.648,84.562 ; AVR.35@104.207,83.499 ccw(c103.144,84.562) 104.648,84.562 ; AVR.35@104.207,83.499 ccw(c103.144,84.562) 104.648,84.562 ; PA0~PA7.6@104.207,87.443 cw(c103.144,86.38) 104.648,86.38 ; PA0~PA7.6@104.207,87.443 cw(c103.144,86.38) 104.648,86.38 ; PA0~PA7.6@104.207,87.443 cw(c103.144,86.38) 104.648,86.38 ; PA0~PA7.6@104.207,87.443 cw(c103.144,86.38) 104.648,86.38 ; PA0~PA7.6@104.207,87.443 cw(c103.144,86.38) 104.648,86.38 ; PA0~PA7.6@104.207,87.443 cw(c103.144,86.38) 104.648,86.38 ; PA0~PA7.6@104.207,87.443 cw(c103.144,86.38) 104.648,86.38 ; AVR.35@104.387,83.319 ccw(c103.757,83.949) 104.648,83.949 ; AVR.35@104.387,83.319 ccw(c103.757,83.949) 104.648,83.949 ; AVR.35@104.387,83.319 ccw(c103.757,83.949) 104.648,83.949 ; AVR.35@104.387,83.319 ccw(c103.757,83.949) 104.648,83.949 ; AVR.35@104.387,83.319 ccw(c103.757,83.949) 104.648,83.949 ; AVR.35@104.387,83.319 ccw(c103.757,83.949) 104.648,83.949 ; AVR.35@104.387,83.319 ccw(c103.757,83.949) 104.648,83.949 ; PA0~PA7.6@104.387,87.623 cw(c103.757,86.993) 104.648,86.993 ; PA0~PA7.6@104.387,87.623 cw(c103.757,86.993) 104.648,86.993 ; PA0~PA7.6@104.387,87.623 cw(c103.757,86.993) 104.648,86.993 ; PA0~PA7.6@104.387,87.623 cw(c103.757,86.993) 104.648,86.993 ; PA0~PA7.6@104.387,87.623 cw(c103.757,86.993) 104.648,86.993 ; PA0~PA7.6@104.387,87.623 cw(c103.757,86.993) 104.648,86.993 ; PA0~PA7.6@104.387,87.623 cw(c103.757,86.993) 104.648,86.993 ; 104.648,83.949 ccw(c105.539,83.949) AVR.35@104.909,83.319 ; 104.648,83.949 ccw(c105.539,83.949) AVR.35@104.909,83.319 ; 104.648,83.949 ccw(c105.539,83.949) AVR.35@104.909,83.319 ; 104.648,83.949 ccw(c105.539,83.949) AVR.35@104.909,83.319 ; 104.648,83.949 ccw(c105.539,83.949) AVR.35@104.909,83.319 ; 104.648,83.949 ccw(c105.539,83.949) AVR.35@104.909,83.319 ; 104.648,83.949 ccw(c105.539,83.949) AVR.35@104.909,83.319 ; 104.648,84.562 ccw(c106.152,84.562) AVR.35@105.089,83.499 ; 104.648,84.562 ccw(c106.152,84.562) AVR.35@105.089,83.499 ; 104.648,84.562 ccw(c106.152,84.562) AVR.35@105.089,83.499 ; 104.648,84.562 ccw(c106.152,84.562) AVR.35@105.089,83.499 ; 104.648,84.562 ccw(c106.152,84.562) AVR.35@105.089,83.499 ; 104.648,84.562 ccw(c106.152,84.562) AVR.35@105.089,83.499 ; 104.648,84.562 ccw(c106.152,84.562) AVR.35@105.089,83.499 ; 104.648,86.38 cw(c106.152,86.38) PA0~PA7.6@105.089,87.443 ; 104.648,86.38 cw(c106.152,86.38) PA0~PA7.6@105.089,87.443 ; 104.648,86.38 cw(c106.152,86.38) PA0~PA7.6@105.089,87.443 ; 104.648,86.38 cw(c106.152,86.38) PA0~PA7.6@105.089,87.443 ; 104.648,86.38 cw(c106.152,86.38) PA0~PA7.6@105.089,87.443 ; 104.648,86.38 cw(c106.152,86.38) PA0~PA7.6@105.089,87.443 ; 104.648,86.38 cw(c106.152,86.38) PA0~PA7.6@105.089,87.443 ; 104.648,86.993 cw(c105.539,86.993) PA0~PA7.6@104.909,87.623 ; 104.648,86.993 cw(c105.539,86.993) PA0~PA7.6@104.909,87.623 ; 104.648,86.993 cw(c105.539,86.993) PA0~PA7.6@104.909,87.623 ; 104.648,86.993 cw(c105.539,86.993) PA0~PA7.6@104.909,87.623 ; 104.648,86.993 cw(c105.539,86.993) PA0~PA7.6@104.909,87.623 ; 104.648,86.993 cw(c105.539,86.993) PA0~PA7.6@104.909,87.623 ; 104.648,86.993 cw(c105.539,86.993) PA0~PA7.6@104.909,87.623 ; D2.9@109.093,110.505 cw(c108.491,109.728) 109.474,109.728 ; D2.9@109.093,110.505 cw(c108.491,109.728) 109.474,109.728 ; D2.9@109.093,110.505 cw(c108.491,109.728) 109.474,109.728 ; D2.9@109.093,110.505 cw(c108.491,109.728) 109.474,109.728 ; D2.9@109.093,110.505 cw(c108.491,109.728) 109.474,109.728 ; D2.9@109.093,110.505 cw(c108.491,109.728) 109.474,109.728 ; D2.9@109.093,110.505 cw(c108.491,109.728) 109.474,109.728 ; D2.9@109.248,110.706 cw(c108.892,110.246) 109.474,110.246 ; D2.9@109.248,110.706 cw(c108.892,110.246) 109.474,110.246 ; D2.9@109.248,110.706 cw(c108.892,110.246) 109.474,110.246 ; D2.9@109.248,110.706 cw(c108.892,110.246) 109.474,110.246 ; D2.9@109.248,110.706 cw(c108.892,110.246) 109.474,110.246 ; D2.9@109.248,110.706 cw(c108.892,110.246) 109.474,110.246 ; D2.9@109.248,110.706 cw(c108.892,110.246) 109.474,110.246 ; 109.474,109.728 cw(c110.457,109.728) D2.9@109.855,110.505 ; 109.474,109.728 cw(c110.457,109.728) D2.9@109.855,110.505 ; 109.474,109.728 cw(c110.457,109.728) D2.9@109.855,110.505 ; 109.474,109.728 cw(c110.457,109.728) D2.9@109.855,110.505 ; 109.474,109.728 cw(c110.457,109.728) D2.9@109.855,110.505 ; 109.474,109.728 cw(c110.457,109.728) D2.9@109.855,110.505 ; 109.474,109.728 cw(c110.457,109.728) D2.9@109.855,110.505 ; 109.474,110.246 cw(c110.056,110.246) D2.9@109.7,110.706 ; 109.474,110.246 cw(c110.056,110.246) D2.9@109.7,110.706 ; 109.474,110.246 cw(c110.056,110.246) D2.9@109.7,110.706 ; 109.474,110.246 cw(c110.056,110.246) D2.9@109.7,110.706 ; 109.474,110.246 cw(c110.056,110.246) D2.9@109.7,110.706 ; 109.474,110.246 cw(c110.056,110.246) D2.9@109.7,110.706 ; 109.474,110.246 cw(c110.056,110.246) D2.9@109.7,110.706 ; D4.9@121.733,110.557 cw(c120.67,109.494) 122.174,109.494 ; D4.9@121.733,110.557 cw(c120.67,109.494) 122.174,109.494 ; D4.9@121.733,110.557 cw(c120.67,109.494) 122.174,109.494 ; D4.9@121.733,110.557 cw(c120.67,109.494) 122.174,109.494 ; D4.9@121.733,110.557 cw(c120.67,109.494) 122.174,109.494 ; D4.9@121.733,110.557 cw(c120.67,109.494) 122.174,109.494 ; D4.9@121.733,110.557 cw(c120.67,109.494) 122.174,109.494 ; D4.9@121.913,110.737 cw(c121.283,110.107) 122.174,110.107 ; D4.9@121.913,110.737 cw(c121.283,110.107) 122.174,110.107 ; D4.9@121.913,110.737 cw(c121.283,110.107) 122.174,110.107 ; D4.9@121.913,110.737 cw(c121.283,110.107) 122.174,110.107 ; D4.9@121.913,110.737 cw(c121.283,110.107) 122.174,110.107 ; D4.9@121.913,110.737 cw(c121.283,110.107) 122.174,110.107 ; D4.9@121.913,110.737 cw(c121.283,110.107) 122.174,110.107 ; 122.174,109.494 cw(c123.678,109.494) D4.9@122.615,110.557 ; 122.174,109.494 cw(c123.678,109.494) D4.9@122.615,110.557 ; 122.174,109.494 cw(c123.678,109.494) D4.9@122.615,110.557 ; 122.174,109.494 cw(c123.678,109.494) D4.9@122.615,110.557 ; 122.174,109.494 cw(c123.678,109.494) D4.9@122.615,110.557 ; 122.174,109.494 cw(c123.678,109.494) D4.9@122.615,110.557 ; 122.174,109.494 cw(c123.678,109.494) D4.9@122.615,110.557 ; 122.174,110.107 cw(c123.065,110.107) D4.9@122.435,110.737 ; 122.174,110.107 cw(c123.065,110.107) D4.9@122.435,110.737 ; 122.174,110.107 cw(c123.065,110.107) D4.9@122.435,110.737 ; 122.174,110.107 cw(c123.065,110.107) D4.9@122.435,110.737 ; 122.174,110.107 cw(c123.065,110.107) D4.9@122.435,110.737 ; 122.174,110.107 cw(c123.065,110.107) D4.9@122.435,110.737 ; 122.174,110.107 cw(c123.065,110.107) D4.9@122.435,110.737 ; D3.9@134.433,110.557 cw(c133.37,109.494) 134.874,109.494 ; D3.9@134.433,110.557 cw(c133.37,109.494) 134.874,109.494 ; D3.9@134.433,110.557 cw(c133.37,109.494) 134.874,109.494 ; D3.9@134.433,110.557 cw(c133.37,109.494) 134.874,109.494 ; D3.9@134.433,110.557 cw(c133.37,109.494) 134.874,109.494 ; D3.9@134.433,110.557 cw(c133.37,109.494) 134.874,109.494 ; D3.9@134.433,110.557 cw(c133.37,109.494) 134.874,109.494 ; D3.9@134.613,110.737 cw(c133.983,110.107) 134.874,110.107 ; D3.9@134.613,110.737 cw(c133.983,110.107) 134.874,110.107 ; D3.9@134.613,110.737 cw(c133.983,110.107) 134.874,110.107 ; D3.9@134.613,110.737 cw(c133.983,110.107) 134.874,110.107 ; D3.9@134.613,110.737 cw(c133.983,110.107) 134.874,110.107 ; D3.9@134.613,110.737 cw(c133.983,110.107) 134.874,110.107 ; D3.9@134.613,110.737 cw(c133.983,110.107) 134.874,110.107 ; 134.874,109.494 cw(c136.378,109.494) D3.9@135.315,110.557 ; 134.874,109.494 cw(c136.378,109.494) D3.9@135.315,110.557 ; 134.874,109.494 cw(c136.378,109.494) D3.9@135.315,110.557 ; 134.874,109.494 cw(c136.378,109.494) D3.9@135.315,110.557 ; 134.874,109.494 cw(c136.378,109.494) D3.9@135.315,110.557 ; 134.874,109.494 cw(c136.378,109.494) D3.9@135.315,110.557 ; 134.874,109.494 cw(c136.378,109.494) D3.9@135.315,110.557 ; 134.874,110.107 cw(c135.765,110.107) D3.9@135.135,110.737 ; 134.874,110.107 cw(c135.765,110.107) D3.9@135.135,110.737 ; 134.874,110.107 cw(c135.765,110.107) D3.9@135.135,110.737 ; 134.874,110.107 cw(c135.765,110.107) D3.9@135.135,110.737 ; 134.874,110.107 cw(c135.765,110.107) D3.9@135.135,110.737 ; 134.874,110.107 cw(c135.765,110.107) D3.9@135.135,110.737 ; 134.874,110.107 cw(c135.765,110.107) D3.9@135.135,110.737
  Bottom Layer w0.254: D1.9@96.774,110.998 96.774,109.601 ; PA0~PA7.6@104.648,87.884 102.743,85.979 90.424,85.979 89.408,86.995 89.408,105.664 92.202,108.458 95.631,108.458 96.774,109.601 ; D1.9@96.358,110.534 cw(c95.519,109.601) 96.774,109.601 ; D1.9@96.358,110.534 cw(c95.519,109.601) 96.774,109.601 ; D1.9@96.358,110.534 cw(c95.519,109.601) 96.774,109.601 ; D1.9@96.358,110.534 cw(c95.519,109.601) 96.774,109.601 ; D1.9@96.358,110.534 cw(c95.519,109.601) 96.774,109.601 ; D1.9@96.358,110.534 cw(c95.519,109.601) 96.774,109.601 ; D1.9@96.358,110.534 cw(c95.519,109.601) 96.774,109.601 ; D1.9@96.527,110.723 cw(c96.031,110.171) 96.774,110.171 ; D1.9@96.527,110.723 cw(c96.031,110.171) 96.774,110.171 ; D1.9@96.527,110.723 cw(c96.031,110.171) 96.774,110.171 ; D1.9@96.527,110.723 cw(c96.031,110.171) 96.774,110.171 ; D1.9@96.527,110.723 cw(c96.031,110.171) 96.774,110.171 ; D1.9@96.527,110.723 cw(c96.031,110.171) 96.774,110.171 ; D1.9@96.527,110.723 cw(c96.031,110.171) 96.774,110.171 ; 96.774,109.601 cw(c98.029,109.601) D1.9@97.19,110.534 ; 96.774,109.601 cw(c98.029,109.601) D1.9@97.19,110.534 ; 96.774,109.601 cw(c98.029,109.601) D1.9@97.19,110.534 ; 96.774,109.601 cw(c98.029,109.601) D1.9@97.19,110.534 ; 96.774,109.601 cw(c98.029,109.601) D1.9@97.19,110.534 ; 96.774,109.601 cw(c98.029,109.601) D1.9@97.19,110.534 ; 96.774,109.601 cw(c98.029,109.601) D1.9@97.19,110.534 ; 96.774,110.171 cw(c97.517,110.171) D1.9@97.021,110.723 ; 96.774,110.171 cw(c97.517,110.171) D1.9@97.021,110.723 ; 96.774,110.171 cw(c97.517,110.171) D1.9@97.021,110.723 ; 96.774,110.171 cw(c97.517,110.171) D1.9@97.021,110.723 ; 96.774,110.171 cw(c97.517,110.171) D1.9@97.021,110.723 ; 96.774,110.171 cw(c97.517,110.171) D1.9@97.021,110.723 ; 96.774,110.171 cw(c97.517,110.171) D1.9@97.021,110.723 ; 103.584,86.82 cw(c104.648,85.757) PA0~PA7.6@104.648,87.261 ; 103.584,86.82 ccw(c102.521,87.884) PA0~PA7.6@104.025,87.884 ; 103.584,86.82 cw(c104.648,85.757) PA0~PA7.6@104.648,87.261 ; 103.584,86.82 ccw(c102.521,87.884) PA0~PA7.6@104.025,87.884 ; 103.584,86.82 ccw(c102.521,87.884) PA0~PA7.6@104.025,87.884 ; 103.584,86.82 cw(c104.648,85.757) PA0~PA7.6@104.648,87.261 ; 103.584,86.82 ccw(c102.521,87.884) PA0~PA7.6@104.025,87.884 ; 103.584,86.82 cw(c104.648,85.757) PA0~PA7.6@104.648,87.261 ; 103.584,86.82 ccw(c102.521,87.884) PA0~PA7.6@104.025,87.884 ; 103.584,86.82 cw(c104.648,85.757) PA0~PA7.6@104.648,87.261 ; 103.584,86.82 ccw(c102.521,87.884) PA0~PA7.6@104.025,87.884 ; 103.584,86.82 cw(c104.648,85.757) PA0~PA7.6@104.648,87.261 ; 103.584,86.82 ccw(c102.521,87.884) PA0~PA7.6@104.025,87.884 ; 103.584,86.82 cw(c104.648,85.757) PA0~PA7.6@104.648,87.261 ; 104.018,87.254 cw(c104.648,86.624) PA0~PA7.6@104.648,87.515 ; 104.018,87.254 ccw(c103.388,87.884) PA0~PA7.6@104.279,87.884 ; 104.018,87.254 cw(c104.648,86.624) PA0~PA7.6@104.648,87.515 ; 104.018,87.254 ccw(c103.388,87.884) PA0~PA7.6@104.279,87.884 ; 104.018,87.254 ccw(c103.388,87.884) PA0~PA7.6@104.279,87.884 ; 104.018,87.254 cw(c104.648,86.624) PA0~PA7.6@104.648,87.515 ; 104.018,87.254 ccw(c103.388,87.884) PA0~PA7.6@104.279,87.884 ; 104.018,87.254 cw(c104.648,86.624) PA0~PA7.6@104.648,87.515 ; 104.018,87.254 ccw(c103.388,87.884) PA0~PA7.6@104.279,87.884 ; 104.018,87.254 cw(c104.648,86.624) PA0~PA7.6@104.648,87.515 ; 104.018,87.254 ccw(c103.388,87.884) PA0~PA7.6@104.279,87.884 ; 104.018,87.254 cw(c104.648,86.624) PA0~PA7.6@104.648,87.515 ; 104.018,87.254 ccw(c103.388,87.884) PA0~PA7.6@104.279,87.884 ; 104.018,87.254 cw(c104.648,86.624) PA0~PA7.6@104.648,87.515